# Altium PCB FIoT_BG96.PcbDoc
Units mm, origin at the board's own origin, x right, y up, seen from the top; angles counter-clockwise.
Board outline 34.2 x 39.9 mm, 4 copper layers (Top Layer, Int1 (GND), Int2 (PWR), Bottom Layer), stack 1.369 mm thick; 68 components, 41 nets, 292 pads, 116 vias.
Unrouted connection lines stored in the file: 92.
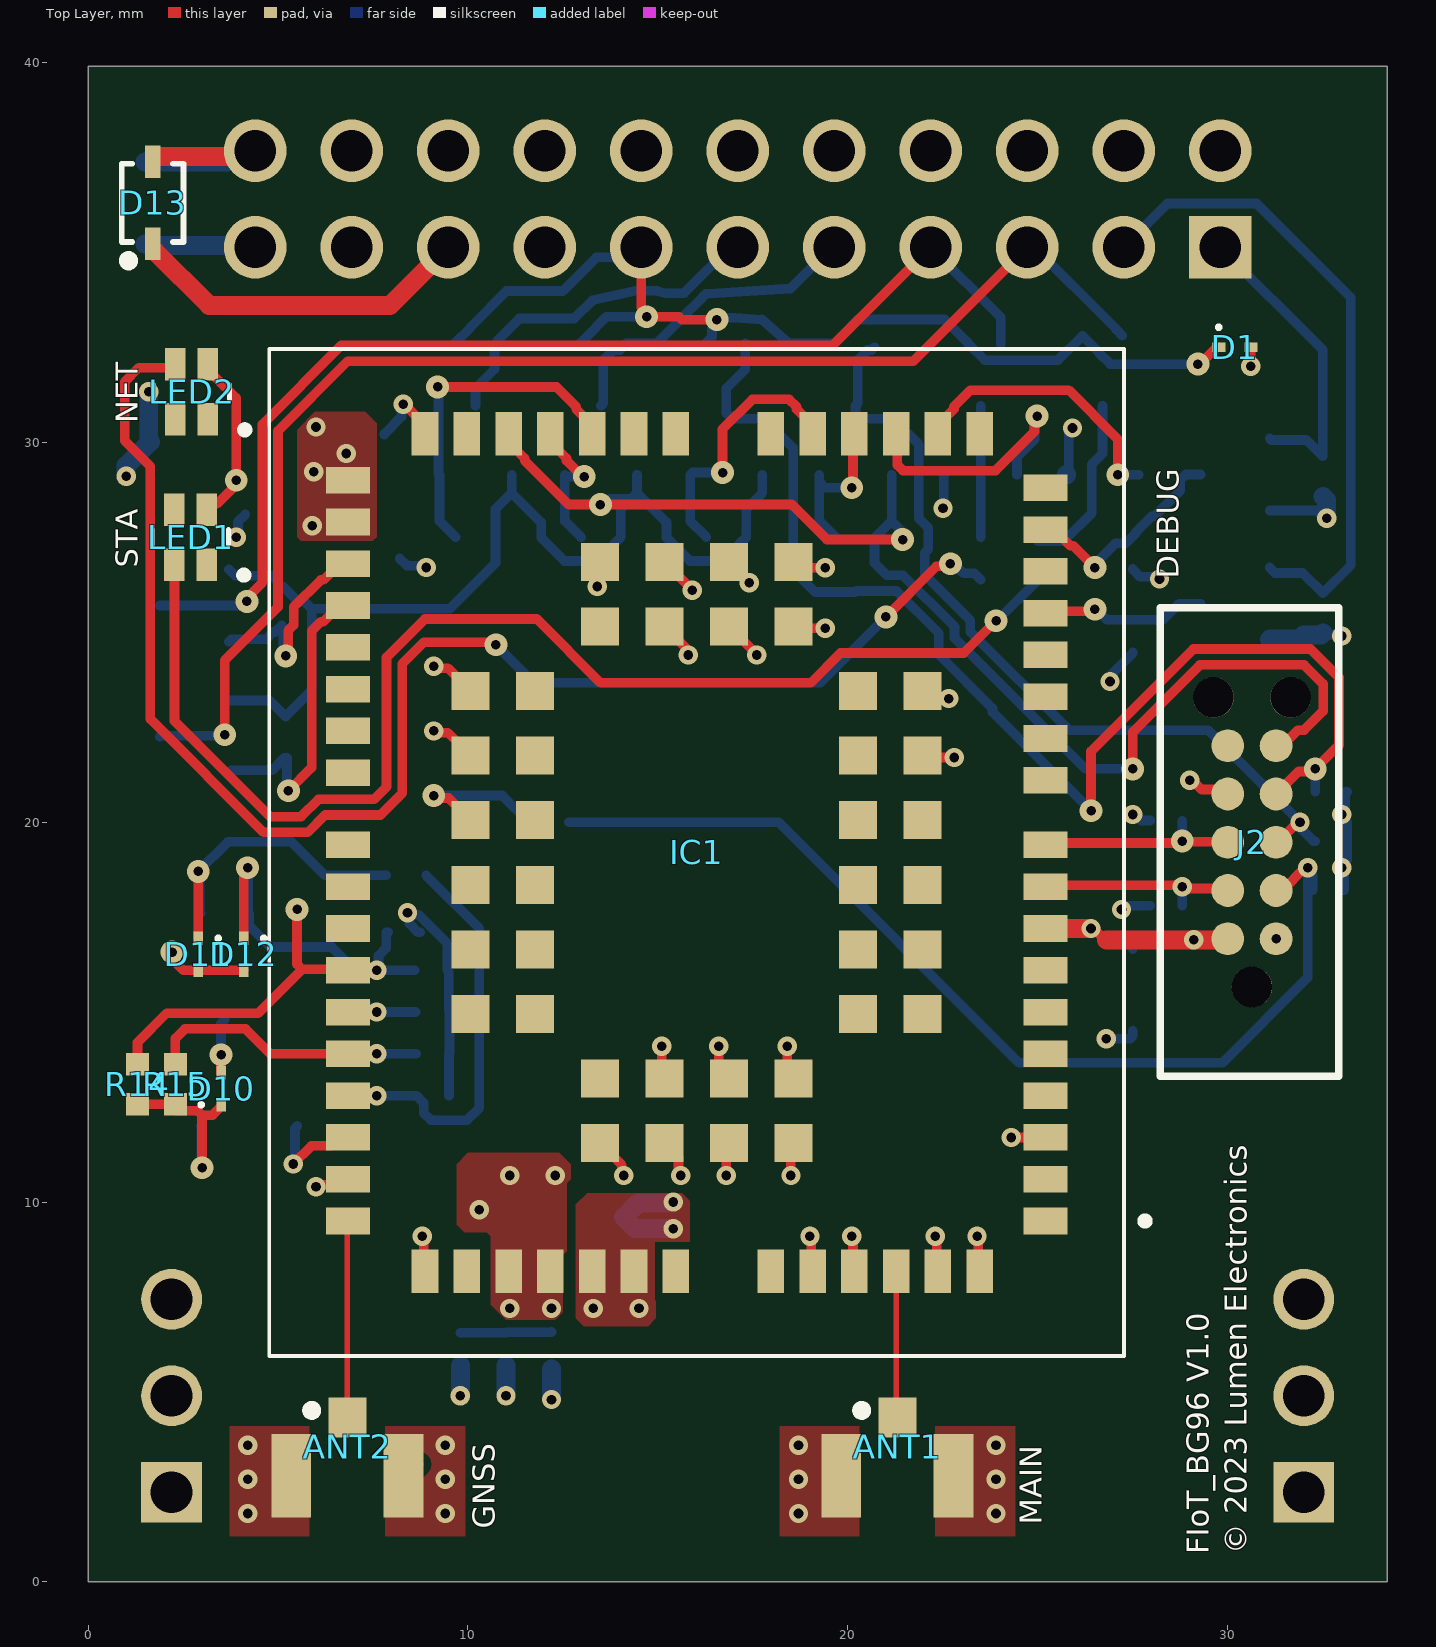
[diagram p0: Top Layer view]
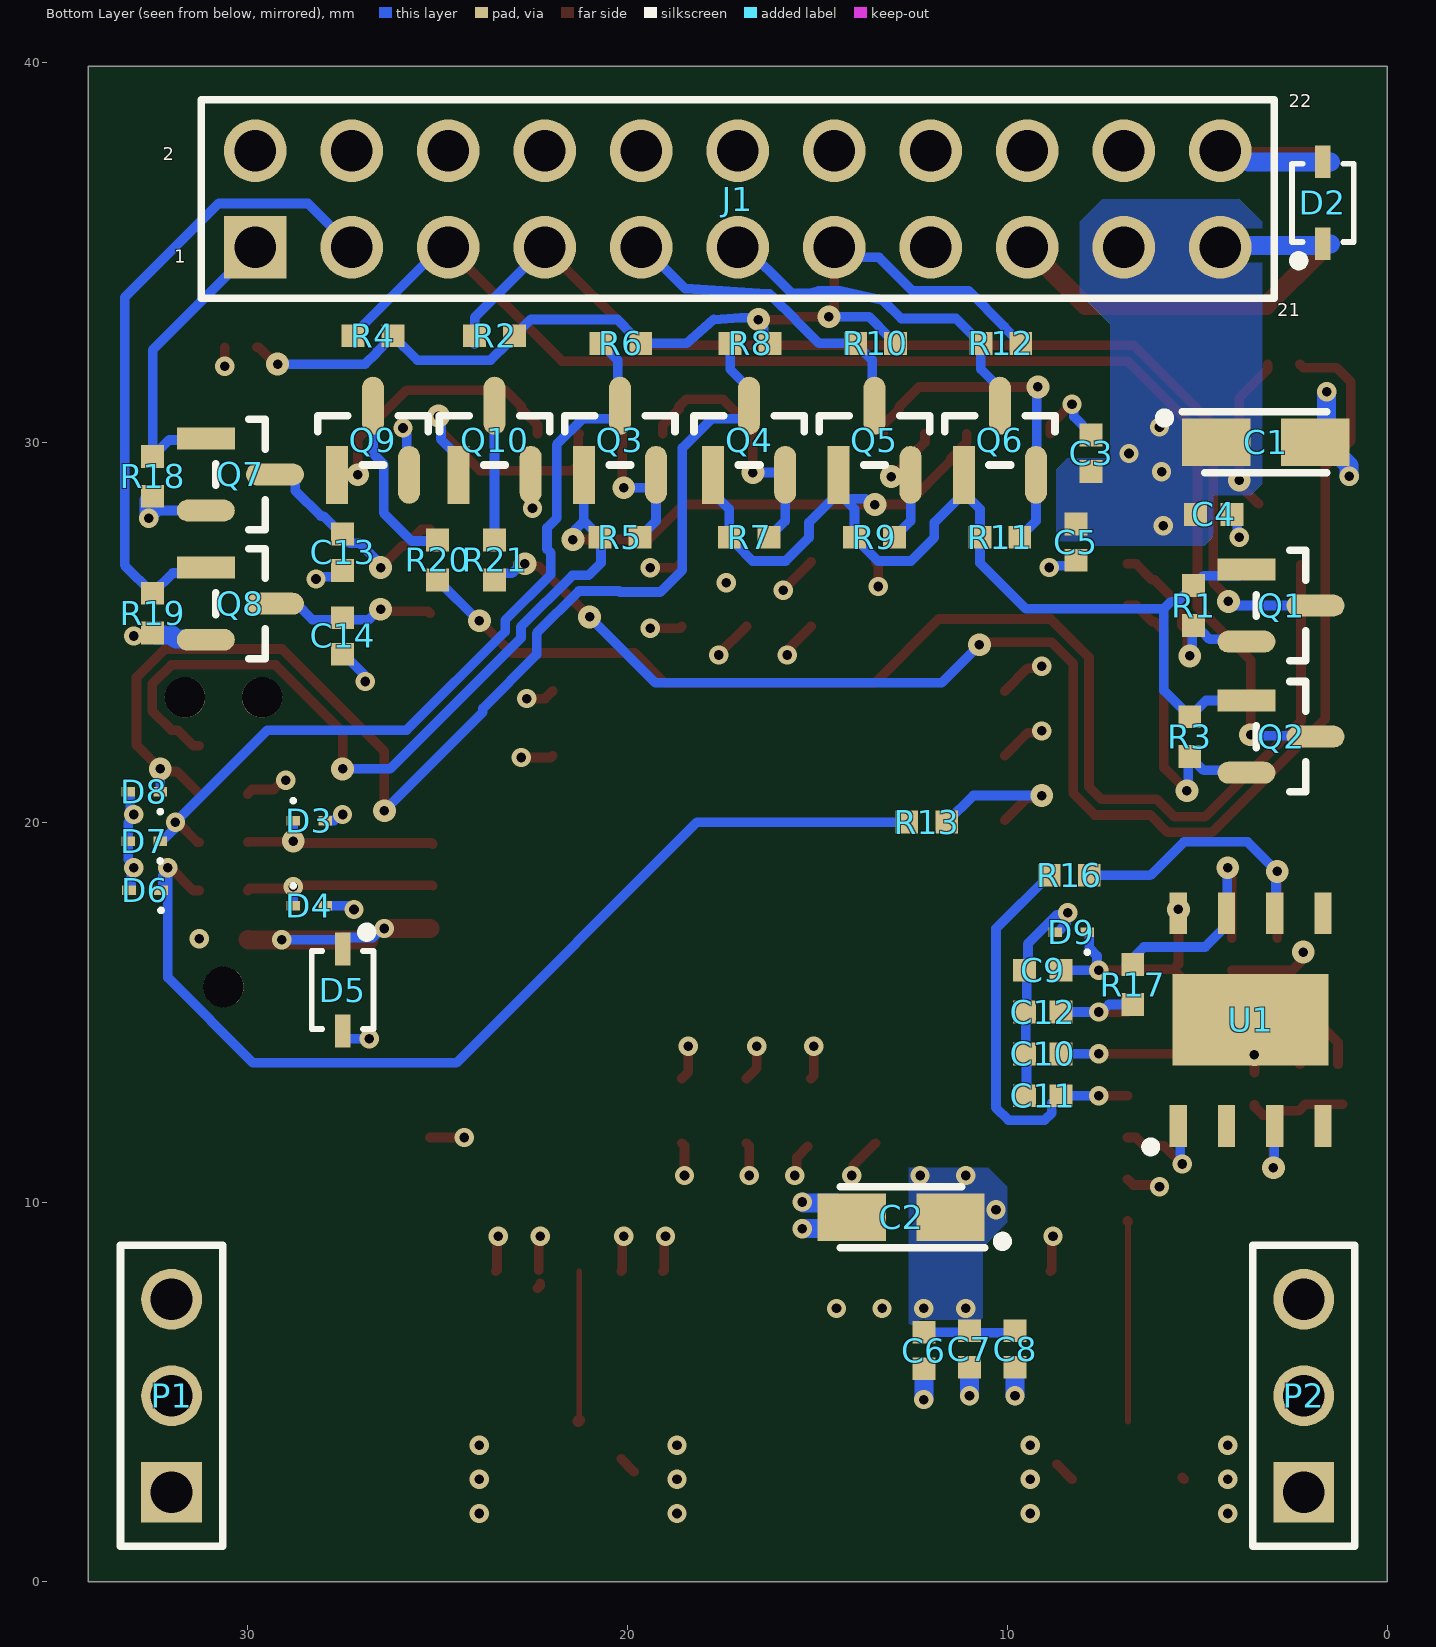
[diagram p1: Bottom Layer view, seen from below]
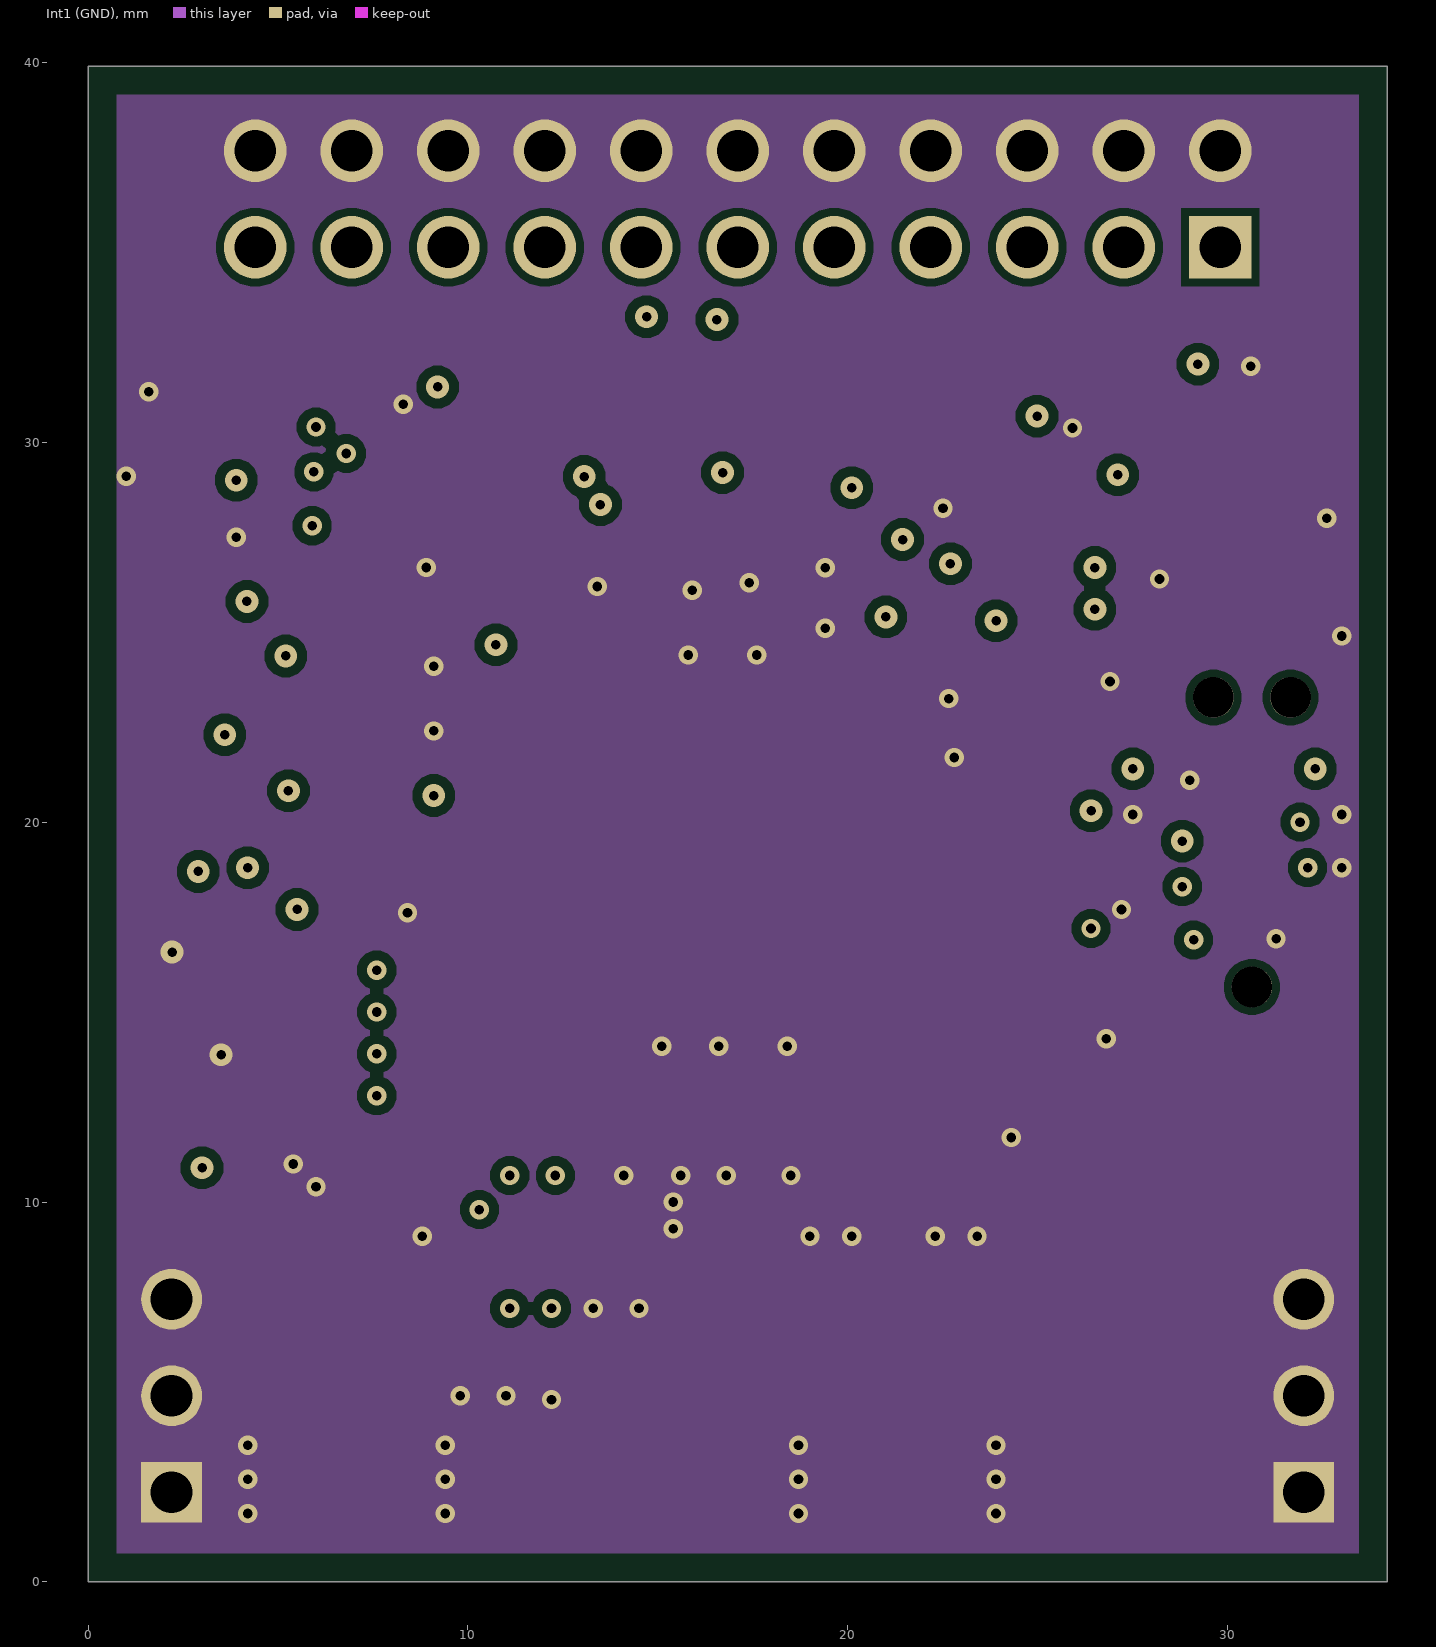
[diagram p2: Int1 (GND)]
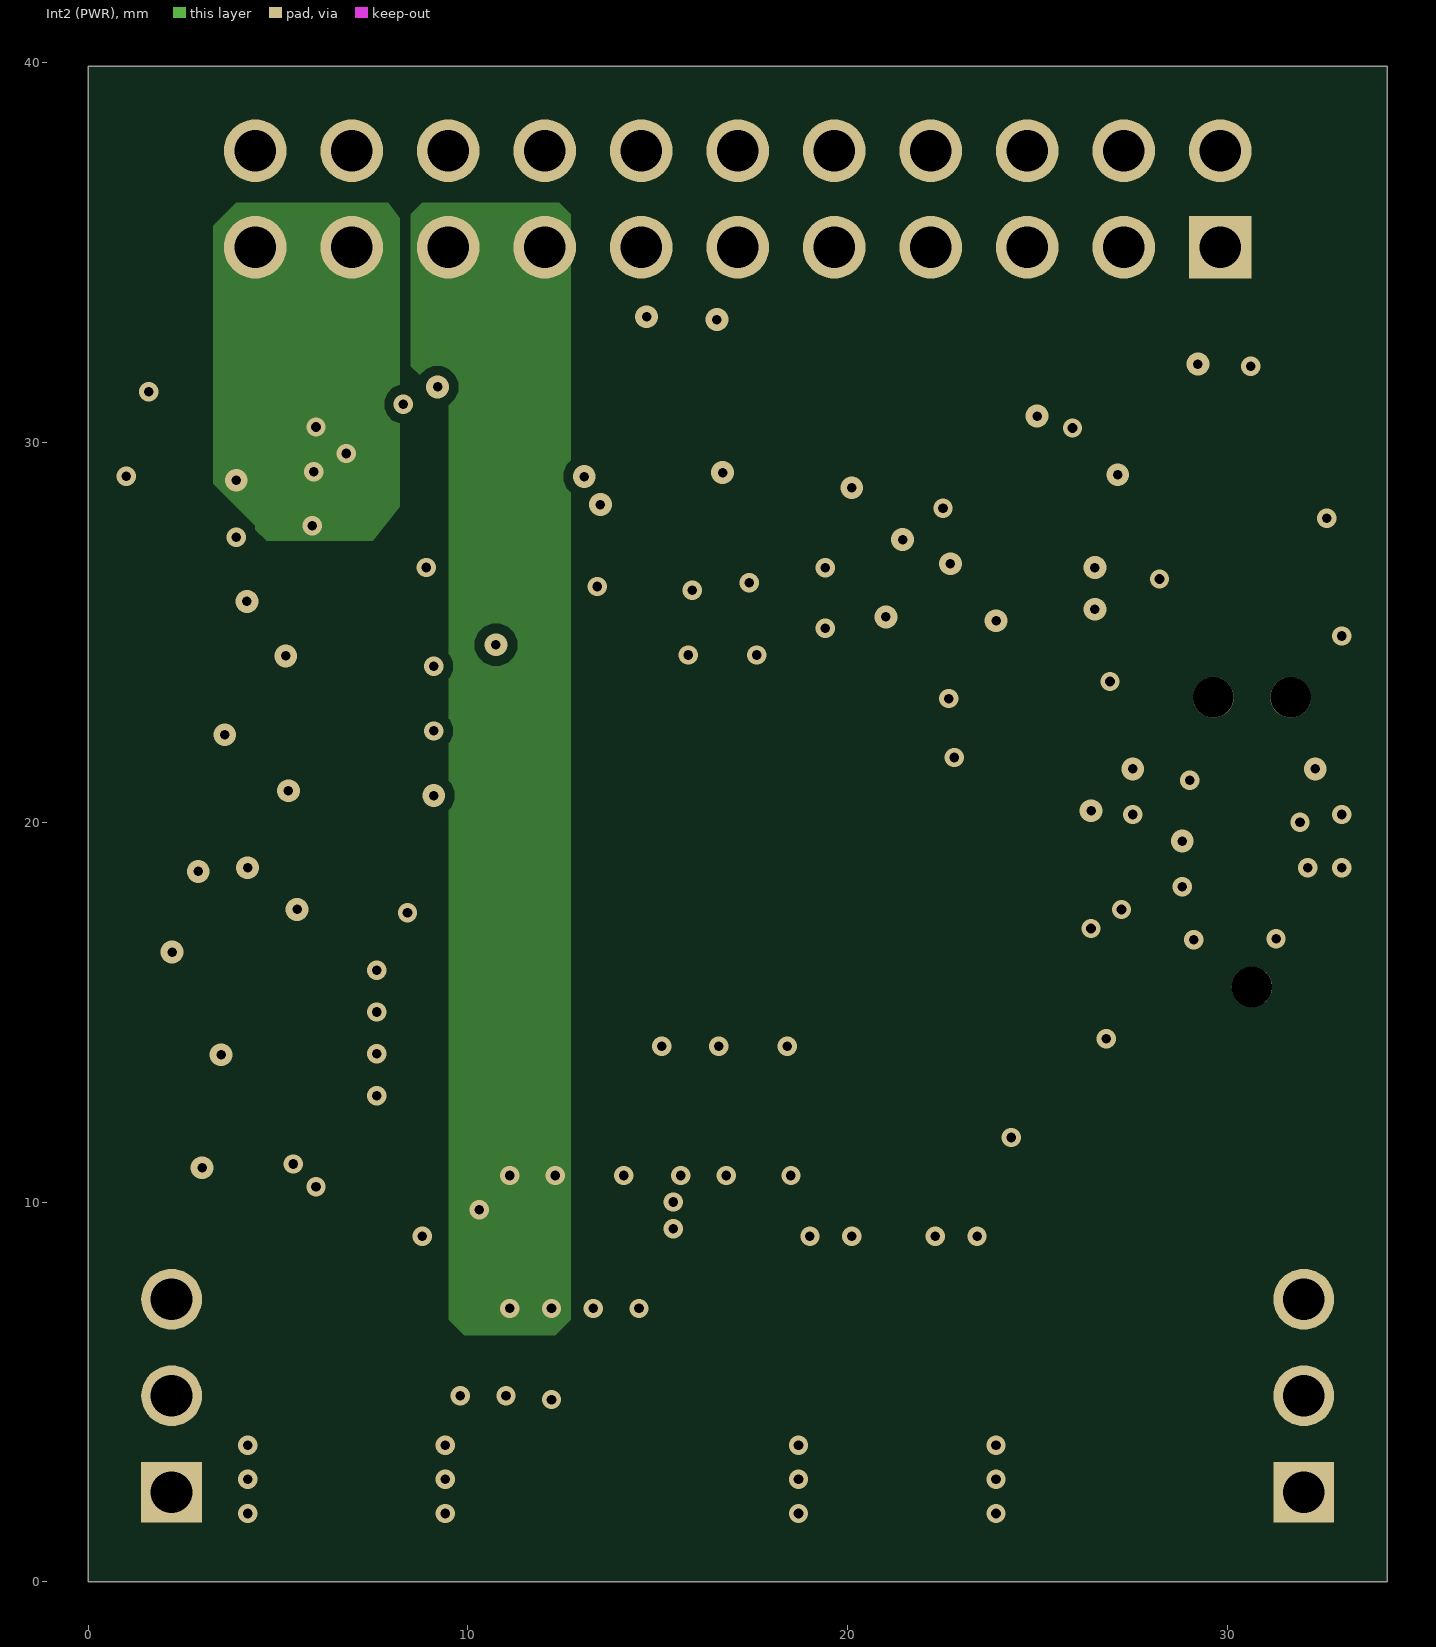
[diagram p3: Int2 (PWR)]
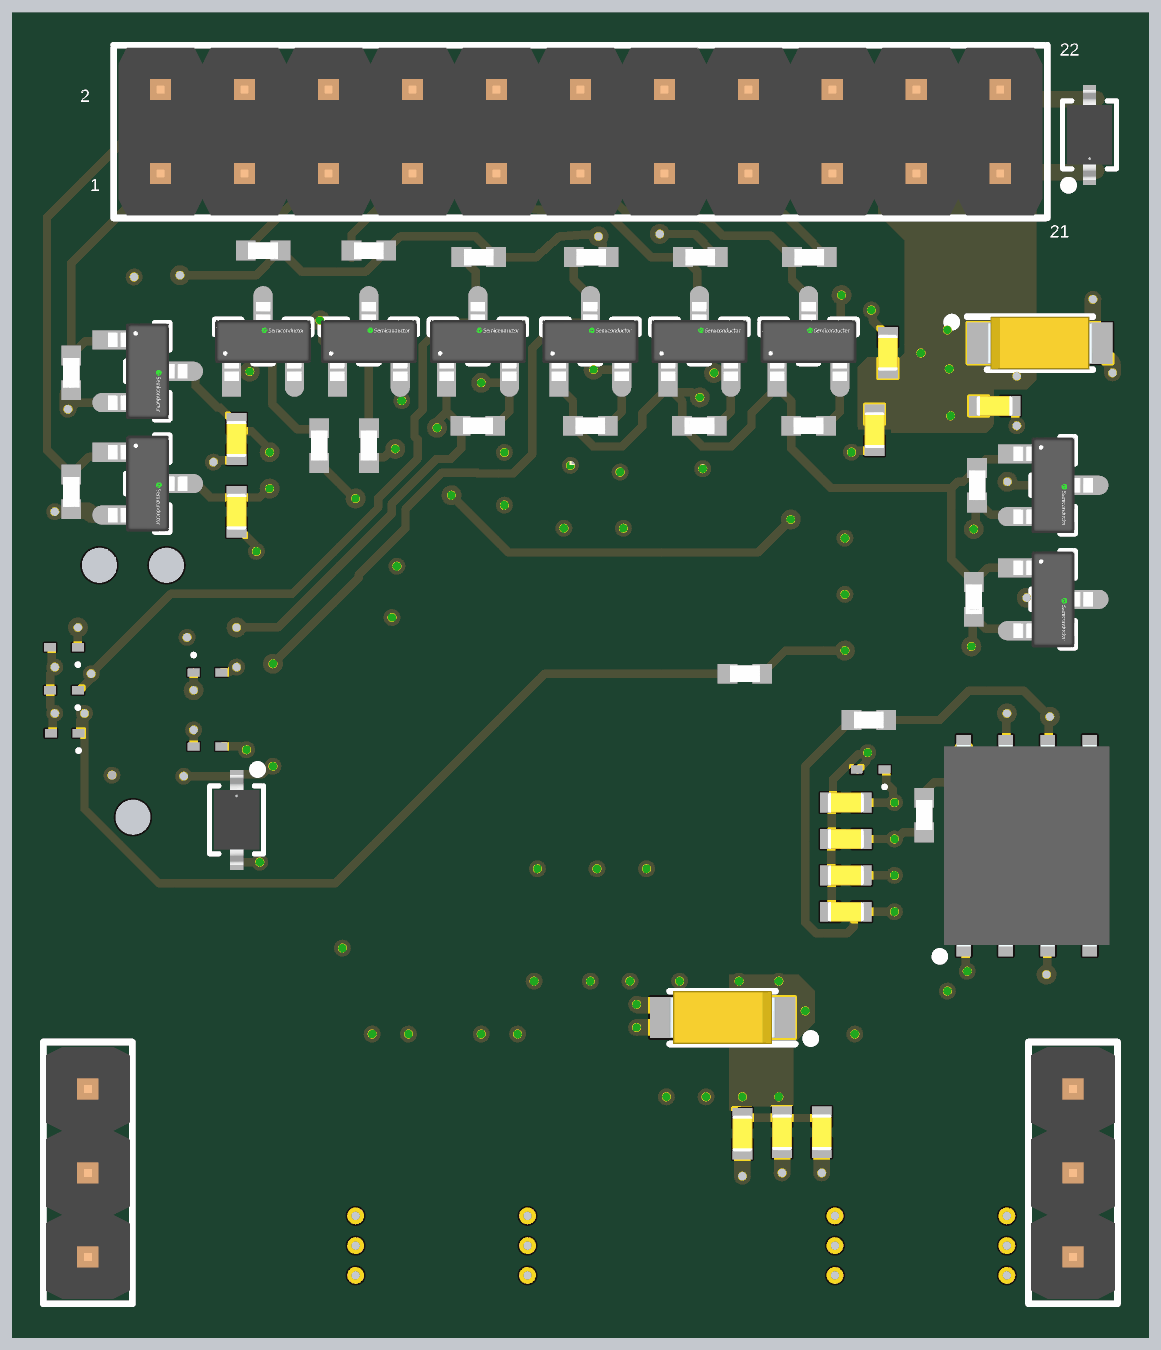
[diagram p4: 3D render of the assembled board from below, using the file's embedded part models]

## Layer stack, top to bottom
Top Solder: solder mask 0.0254, SM-001, Dk 4
Top Layer: signal copper 0.035
Dielectric 1: prepreg 0.1295, PP-017, Dk 4.3
Dielectric 2: prepreg 0.1295, PP-017, Dk 4.3
Int1 (GND): signal copper 0.035
Dielectric 3: core 0.7112, Core-039, Dk 4.8
Int2 (PWR): signal copper 0.035
Dielectric 4: prepreg 0.1295, PP-017, Dk 4.3
Dielectric 5: prepreg 0.1295, PP-017, Dk 4.3
Bottom Layer: signal copper 0.035
Bottom Solder: solder mask 0.0254, SM-001, Dk 4

## Board outline
0,0 34.2,0 34.2,39.9 0,39.9

## Design rules (kind name [scope] priority, off if disabled: settings)
BoardOutlineClearance [All] p1: gap=0.75 ignorepadtopadclearanceinfootprint=FALSE
Clearance [All] p1: gap=0.2 ignorepadtopadclearanceinfootprint=TRUE except(0.16: Arc-Arc Arc-Track Track-Track; 0.254: Arc-Via Track-Via SMDPad-Via THPad-Via Via-Via Via-Fill Via-Poly Via-Region Via-Hole)
MinimumSolderMaskSliver [All] p1: minsoldermaskwidth=0.2
PolygonConnect [All] p1: connectstyle=Direct reliefconductorwidth=0.5 reliefentries=4 polygonreliefangle="90 Angle" airgapwidth=0.1
RoutingVias [All] p1: holewidth=0.25 width=0.6 viastyle="Through Hole" minholewidth=0.2 minwidth=0.5 maxholewidth=0.3 maxwidth=0.7
SilkToSilkClearance [All] p1: silktosilkclearance=0.128
SilkToSolderMaskClearance [IsPad] p1: minsilkscreentomaskgap=0.07 clearancetoexposedcopper=TRUE
SolderMaskExpansion [All] p1: expansion=0.05 istentingtop=FALSE
Width [All] p1: maxlimit=3 minlimit=0.1 preferedwidth=0.254
27 further rules are at their usual default settings.

## Components (designator, comment, footprint, x,y, rotation, side; value= is the part's Value field where it differs from the comment)
ANT1 "U.FL-R-SMT(01)" HRS-U.FL-R-SMT(10)_V 21.3,2.8 r270 top locked
ANT2 "U.FL-R-SMT(01)" HRS-U.FL-R-SMT(10)_V 6.825,2.8 r270 top locked
C1 "T520A107M006ATE035" CAPPM3216X180N 3.2,30 r180 bottom value="100uF 6.3V Tant"
C2 "T520A107M006ATE035" CAPPM3216X180N 12.8,9.6 r0 bottom value="100uF 6.3V Tant"
C3 "GRM1555C1H6R0CA01D" CAPC1005X06N 7.8,29.71 r270 bottom value="5.6pF 50V"
C4 "GJM1555C1H330GB01D" CAPC1005X06N 4.57,28.1 r0 bottom value="33pF 50V"
C5 "CL05B104KB54PNC" CAPC1005X06N 8.2,27.37 r90 bottom value="100nF 50V"
C6 "GRM1555C1H6R0CA01D" CAPC1005X06N 12.2,6.09 r90 bottom value="5.6pF 50V"
C7 "GJM1555C1H330GB01D" CAPC1005X06N 11,6.13 r90 bottom value="33pF 50V"
C8 "CL05B104KB54PNC" CAPC1005X06N 9.8,6.13 r90 bottom value="100nF 50V"
C9 "CL05B104KB54PNC" CAPC1005X06N 9.07,16.1 r180 bottom value="100nF 50V"
C10 "GJM1555C1H330GB01D" CAPC1005X06N 9.07,13.9 r180 bottom value="33pF 50V"
C11 "GJM1555C1H330GB01D" CAPC1005X06N 9.07,12.8 r180 bottom value="33pF 50V"
C12 "GJM1555C1H330GB01D" CAPC1005X06N 9.07,15 r180 bottom value="33pF 50V"
C13 "CL05B104KB54PNC" CAPC1005X06N 27.5,27.1 r90 bottom value="100nF 50V"
C14 "CL05B104KB54PNC" CAPC1005X06N 27.5,24.9 r90 bottom value="100nF 50V"
D1 "ESD9X3.3ST5G" ONSC-SOD-923-2-514AA-01_V 30.18,32.5 r0 top value="3V3 TVS"
D2 "PZ3D4V2H" CR_SD05_SEM-L 1.7,36.3 r90 bottom
D3 "ESD9L5.0ST5G" ONSC-SOD-923-2-514AA-01_V 28.38,20.04 r180 bottom value="5V TVS"
D4 "ESD9L5.0ST5G" ONSC-SOD-923-2-514AA-01_V 28.38,17.8 r180 bottom value="5V TVS"
D5 "SD12C.TCT" CR_SD05_SEM-L 27.5,15.579 r270 bottom
D6 "ESD9X3.3ST5G" ONSC-SOD-923-2-514AA-01_V 32.7,18.2 r0 bottom value="3V3 TVS"
D7 "ESD9X3.3ST5G" ONSC-SOD-923-2-514AA-01_V 32.72,19.5 r0 bottom value="3V3 TVS"
D8 "ESD9X3.3ST5G" ONSC-SOD-923-2-514AA-01_V 32.72,20.8 r0 bottom value="3V3 TVS"
D9 "ESD9L5.0ST5G" ONSC-SOD-923-2-514AA-01_V 8.32,17.1 r0 bottom value="5V TVS"
D10 "ESD9L5.0ST5G" ONSC-SOD-923-2-514AA-01_V 3.5,12.98 r90 top value="5V TVS"
D11 "ESD9L5.0ST5G" ONSC-SOD-923-2-514AA-01_V 2.9,16.52 r270 top value="5V TVS"
D12 "ESD9L5.0ST5G" ONSC-SOD-923-2-514AA-01_V 4.1,16.52 r270 top value="5V TVS"
D13 "PZ3D4V2H" CR_SD05_SEM-L 1.7,36.3 r90 top
IC1 "BG96MA" BG96MA 16.02,19.2 r180 top locked
J1 "61302221121" 61302221121 17.1,36.4 r180 bottom locked
J2 "TC2050-IDC-430" TC2050-IDC_LUMEN 28.095,18.517 r90 top locked
LED1 "LTST-C19HE1WT" LED_LTST-C19HE1WT 2.7,27.5 r180 top locked
LED2 "LTST-C19HE1WT" LED_LTST-C19HE1WT 2.725,31.325 r180 top locked
P1 "61300311121" 61300311121 32,4.9 r90 bottom
P2 "61300311121" 61300311121 2.2,4.9 r90 bottom
Q1 "BSS138K" FP-318-08-IPC_B 2.8,25.7 r180 bottom locked
Q2 "BSS138K" FP-318-08-IPC_B 2.8,22.25 r180 bottom
Q3 "BSS138K" FP-318-08-IPC_B 20.2,30.05 r90 bottom
Q4 "BSS138K" FP-318-08-IPC_B 16.8,30.05 r90 bottom
Q5 "BSS138K" FP-318-08-IPC_B 13.5,30.05 r90 bottom
Q6 "BSS138K" FP-318-08-IPC_B 10.2,30.05 r90 bottom
Q7 "BSS138K" FP-318-08-IPC_B 30.19,29.15 r180 bottom
Q8 "BSS138K" FP-318-08-IPC_B 30.19,25.75 r180 bottom
Q9 "BSS138K" FP-318-08-IPC_B 26.7,30.05 r90 bottom
Q10 "BSS138K" FP-318-08-IPC_B 23.5,30.05 r90 bottom
R1 "0402WGF1002TCE" FP-CRCW0402-E3-MFG 5.1,25.7 r90 bottom
R2 "0402WGF1002TCE" FP-CRCW0402-E3-MFG 23.5,32.8 r180 bottom
R3 "0402WGF1002TCE" FP-CRCW0402-E3-MFG 5.2,22.25 r90 bottom
R4 "0402WGF1002TCE" FP-CRCW0402-E3-MFG 26.7,32.8 r180 bottom
R5 "0402WGF1002TCE" FP-CRCW0402-E3-MFG 20.2,27.5 r0 bottom
R6 "0402WGF1002TCE" FP-CRCW0402-E3-MFG 20.175,32.6 r180 bottom
R7 "0402WGF1002TCE" FP-CRCW0402-E3-MFG 16.8,27.5 r0 bottom
R8 "0402WGF1002TCE" FP-CRCW0402-E3-MFG 16.775,32.6 r180 bottom
R9 "0402WGF1002TCE" FP-CRCW0402-E3-MFG 13.5,27.5 r0 bottom
R10 "0402WGF1002TCE" FP-CRCW0402-E3-MFG 13.475,32.6 r180 bottom
R11 "0402WGF1002TCE" FP-CRCW0402-E3-MFG 10.2,27.5 r0 bottom
R12 "0402WGF1002TCE" FP-CRCW0402-E3-MFG 10.175,32.6 r180 bottom
R13 "0402WGF1002TCE" FP-CRCW0402-E3-MFG 12.125,20 r180 bottom
R14 "0402WGF1502TCE0402WGF1002TCE" FP-CRCW0402-E3-MFG 1.3,13.1 r90 top
R15 "0402WGF220JTCE" FP-CRCW0402-E3-MFG 2.3,13.1 r90 top
R16 "0402WGF220JTCE" FP-CRCW0402-E3-MFG 8.375,18.6 r0 bottom
R17 "0402WGF220JTCE" FP-CRCW0402-E3-MFG 6.7,15.725 r270 bottom
R18 "0402WGF1002TCE" FP-CRCW0402-E3-MFG 32.5,29.1 r90 bottom
R19 "0402WGF1002TCE" FP-CRCW0402-E3-MFG 32.5,25.5 r90 bottom
R20 "0402WGF1001TCE" FP-CRCW0402-E3-MFG 25,26.9 r270 bottom
R21 "0402WGF1001TCE" FP-CRCW0402-E3-MFG 23.5,26.9 r270 bottom
U1 "Arkessa LP MFF2" SON127P600X500X100-9N-D 3.6,14.8 r90 bottom

## Footprints (in the part's own frame and the unit in brackets; to place one, negate y for a bottom-side part, rotate by r counter-clockwise, add the part's x,y. Pads: shape width x height; smd on the part's side, far side on the other; paste and mask are expansions set on the pad)
61300311121 [mm] "Pin Header, pitch 2.54 mm, THT, Vertical, single row, 3p"
  rect 1.6x1.6 hole 1.1: 1(-2.54,0)
  round 1.6 hole 1.1: 2(0,0) 3(2.54,0)
  silkscreen extent -3.96,-1.35 3.96,1.35, body extent -3.81,-1.27 3.81,1.27, height 8.57
61302221121 [mm] "Pin Header, pitch 2.54 mm, THT, Vertical, dual row, 22p"
  rect 1.65x1.65 hole 1.1: 1(-12.7,-1.27)
  round 1.65 hole 1.1: 2(-12.7,1.27) 3(-10.16,-1.27) 4(-10.16,1.27) 5(-7.62,-1.27) 6(-7.62,1.27) 7(-5.08,-1.27) 8(-5.08,1.27) 9(-2.54,-1.27) 10(-2.54,1.27) 11(0,-1.27) 12(0,1.27) 13(2.54,-1.27) 14(2.54,1.27) 15(5.08,-1.27) 16(5.08,1.27) 17(7.62,-1.27) 18(7.62,1.27) 19(10.16,-1.27) 20(10.16,1.27) 21(12.7,-1.27) 22(12.7,1.27)
  silkscreen extent -14.12,-2.62 14.12,2.62, body extent -13.97,-2.54 13.97,2.54, height 8.59
BG96MA [mm]
  rect 1.15x0.7 smd: 1(-9.18,9.7) 2(-9.18,8.6) 3(-9.18,7.5) 4(-9.18,6.4) 5(-9.18,5.3) 6(-9.18,4.2) 7(-9.18,3.1) 8(-9.18,2) 9(-9.18,0.9) 10(-9.18,-0.2) 11(-9.18,-1.9) 12(-9.18,-3) 13(-9.18,-4.1) 14(-9.18,-5.2) 15(-9.18,-6.3) 16(-9.18,-7.4) 17(-9.18,-8.5) 18(-9.18,-9.6) 32(9.18,-9.8) 33(9.18,-8.7) 34(9.18,-7.6) 35(9.18,-6.5) 36(9.18,-5.4) 37(9.18,-4.3) 38(9.18,-3.2) 39(9.18,-2.1) 40(9.18,-0.2) 41(9.18,0.9) 42(9.18,2) 43(9.18,3.1) 44(9.18,4.2) 45(9.18,5.3) 46(9.18,6.4) 47(9.18,7.5) 48(9.18,8.6) 49(9.18,9.7)
  rect 0.7x1.15 smd: 19(-7.45,-11.025) 20(-6.35,-11.025) 21(-5.25,-11.025) 22(-4.15,-11.025) 23(-3.05,-11.025) 24(-1.95,-11.025) 25(0.55,-11.025) 26(1.65,-11.025) 27(2.75,-11.025) 28(3.85,-11.025) 29(4.95,-11.025) 30(6.05,-11.025) 31(7.15,-11.025) 50(7.15,11.025) 51(6.05,11.025) 52(4.95,11.025) 53(3.85,11.025) 54(2.75,11.025) 55(1.65,11.025) 56(0.55,11.025) 57(-1.95,11.025) 58(-3.05,11.025) 59(-4.15,11.025) 60(-5.25,11.025) 61(-6.35,11.025) 62(-7.45,11.025)
  rect 1x1 smd: 63(-5.95,4.25) 64(-5.95,2.55) 65(-5.95,0.85) 66(-5.95,-0.85) 67(-5.95,-2.55) 68(-5.95,-4.25) 69(-2.55,-7.65) 70(-0.85,-7.65) 71(0.85,-7.65) 72(2.55,-7.65) 73(5.95,-4.25) 74(5.95,-2.55) 75(5.95,-0.85) 76(5.95,0.85) 77(5.95,2.55) 78(5.95,4.25) 79(2.55,7.65) 80(0.85,7.65) 81(-0.85,7.65) 82(-2.55,7.65) 83(-4.25,4.25) 84(-4.25,2.55) 85(-4.25,0.85) 86(-4.25,-0.85) 87(-4.25,-2.55) 88(-4.25,-4.25) 89(-2.55,-5.95) 90(-0.85,-5.95) 91(0.85,-5.95) 92(2.55,-5.95) 93(4.25,-4.25) 94(4.25,-2.55) 95(4.25,-0.85) 96(4.25,0.85) 97(4.25,2.55) 98(4.25,4.25) 99(2.55,5.95) 100(0.85,5.95) 101(-0.85,5.95) 102(-2.55,5.95)
  silkscreen extent -11.9,-13.25 11.25,13.25, body extent -11.3,-13.21 11.2,13.29, height 2.51
CAPC1005X06N [mm] "Chip Capacitor, 2-Leads, Body 1.00x0.50mm, IPC Medium Density"
  rect 0.6x0.6 smd: 1(-0.48,0) 2(0.48,0)
  body extent -0.55,-0.3 0.55,0.3, height 0.6
CAPPM3216X180N [mm]
  rect 1.8x1.25 smd: 1(-1.3,0) 2(1.3,0)
  silkscreen extent -2.79,-0.8 1.6,0.8, body extent -1.6,-0.8 1.6,0.8, height 1.8
CR_SD05_SEM-L [mil]
  rect 34x16 smd paste+0 mask+0: 1(-42.5,0) 2(42.5,0)
  silkscreen extent -65,-32 40,32, body extent -54,-27 54,27, height 43
FP-318-08-IPC_B [mm]
  rect 1.524x0.578 smd paste+0 mask+0: 1(-0.91,0.95)
  rrect100% 1.524x0.578 smd paste+0 mask+0: 2(-0.91,-0.95) 3(0.91,0)
  silkscreen extent -0.65,-1.45 0.65,1.45, body extent -1.2,-1.45 1.2,1.45, height 1.11
FP-CRCW0402-E3-MFG [mm]
  rect 0.6x0.6 smd paste+0 mask+0: 1(-0.525,0) 2(0.525,0)
  body extent -0.5,-0.25 0.5,0.25, height 0.4
HRS-U.FL-R-SMT(10)_V [mm]
  rect 1.05x1 smd: 1(-1.525,0)
  rect 2.2x1.05 smd: 2(0,-1.475) 3(0,1.475)
  silkscreen extent -1.84,-1.06 -1.59,-0.81, body extent -1.3,-1.3 1.3,1.3, height 1.25
LED_LTST-C19HE1WT [mm]
  rect 0.54x0.85 smd: 1(-0.425,0.725) 2(0.425,0.725) 3(0.425,-0.725) 4(-0.425,-0.725)
  silkscreen extent -1.5,-0.2 1,1.1, body extent -0.8,-0.8 0.8,0.8, height 0.36
ONSC-SOD-923-2-514AA-01_V [mm]
  rect 0.36x0.25 smd: 1(-0.42,0) 2(0.42,0)
  silkscreen extent -0.47,0.48 -0.37,0.57, body extent -0.4,-0.3 0.4,0.3, height 0.43
SON127P600X500X100-9N-D [mm]
  rect 1.1x0.45 smd: 1(-2.8,1.905) 2(-2.8,0.635) 3(-2.8,-0.635) 4(-2.8,-1.905) 5(2.8,-1.905) 6(2.8,-0.635) 7(2.8,0.635) 8(2.8,1.905)
  rect 2.4x4.1 smd: 9(0,0)
  silkscreen extent -3.47,2.51 -3.23,2.76, body extent -3.05,-2.5 3.05,2.5, height 1
TC2050-IDC_LUMEN [mil]
  round 34 smd: 1(-62.5,-125) 2(-12.5,-125) 3(37.5,-125) 4(87.5,-125) 5(137.5,-125) 6(137.5,-75) 7(87.5,-75) 8(37.5,-75) 9(-12.5,-75) 10(-62.5,-75)
  round 42 hole 42 unplated: 11(-112.5,-100) 12(187.5,-60.04) 13(187.5,-139.96)
  silkscreen extent -205,-190 280,-5

## Part data
ANT1 ANT2: "CONN RECPT ULTRA-MINI COAX SMD", Centre Contact Resistance=25mohm, Contact Resistance=10mohm, Flammability Rating=UL94V-0, Frequency Max=6GHz, Insulation Resistance=500Mohm, JLC Footprint=ANT-SMD, JLCPCB Part #=C434812, Manufacturer="Hirose Electric", Operating Temperature Max=90degC, Operating Temperature Min=-40degC, Package Description="3-Pin Surface Mount Device, Body 2.6 x 2.6 mm", Package Reference=U.FL-R-SMT(10), Supplier Part Number 1=3908021, Voltage Rating V AC=60V, Approval Category=UL94V-0, Body Plating=Silver, Body Style=StraightJack, Coaxial Termination=Solder, Connector Mounting=PCB, Connector Mounting Orientation=PCBoard, Connector Type=UFLCoaxial, Contact Material=PhosphorBronze, Contact Plating=Gold, Datasheet URL=http://www.farnell.com/datasheets/91524.pdf, Datasheet Version=Feb-04, External Length / Height=2.5mm, Female Contact Material=PhosphorBronze, Female Contact Plating=Gold, Impedance=50ohm, Jacket Material=LCP, Male Contact Material=Brass, Male Contact Plating=Gold, Manufacturer Part Number=U.FL-R-SMT(01), Manufacturer URL=https://www.hirose.com, Material=PhosphorBronze, MFG Name=Hirose, MFG Part Number=U.FL-R-SMT(01), Mounting Type=PCBoard, Operating Frequency Max=6GHz, Outer Contact Resistance=10mohm, Secondary Insulation Material=PBT, Supplier 1=Farnell, Supplier 2=Digi-Key, Supplier 3=Mouser, Supplier Part Number 2=H9161-ND, Supplier Part Number 3=798-U.FL-R-SMT01, SVHC=NoSVHC(18-Jun-2012), Termination Method=Solder, VSWR=1.3
C1 C2: "Tantalum Capacitors - Polymer 6.3 VDC 100uF 1206 20% ESR=35mOhms", JLC Footprint="Not available with JLC", Manufacturer_Name=Kemet, Mouser Part Number=80-T520A107M006AT, Supplier Part Number 1=2855176, Arrow Part Number=T520A107M006ATE035, Arrow Price/Stock=https://www.arrow.com/en/products/t520a107m006ate035/kemet-corporation, Datasheet Link=https://search.kemet.com/component-edge/download/specsheet/T520A107M006ATE035.pdf, Height=1.8mm, JLCPCB Part #="Not available with JLC", Manufacturer_Part_Number=T520A107M006ATE035, MFG Name=Kemet, MFG Part Number=T520A107M006ATE035, Mouser Price/Stock=https://www.mouser.co.uk/ProductDetail/KEMET/T520A107M006ATE035?qs=QvRObDHRS18agZVs%252BDin8A%3D%3D, Supplier 1=Farnell, Supplier 2=Mouser, Supplier Part Number 2=80-T520A107M006AT
C3 C6: library part CC0402BRNPO9BN5R6, "5.6pF 50V NP0 ±0.1pF 0402 MLCC", JLC Footprint=CAP-SMD, JLCPCB Part #=C162118, Manufacturer=TDK, Manufacturer Part Number=C1005C0G1H060C, Supplier Part Number 1=490-8222-1-ND, MFG Name=Murata, MFG Part Number=GRM1555C1H6R0CA01D, Part Number=GRM1555C1H6R0CA01D, Supplier 1=Digi-Key, Supplier 2=Mouser, Supplier Part Number 2=81-GRM1555C1H6R0CA1D
C4 C7 C10 C11 C12: "33pF 50V C0G ±2% 0402 MLCC", JLC Footprint=CAP-SMD, JLCPCB Part #=C162118, Manufacturer=TDK, Manufacturer Part Number=C1005C0G1H060C, MFG Part Number=GRM1555C1H6R0CA01D, Supplier Part Number 1=3784396, MFG Name=Murata, Part Number=GRM1555C1H6R0CA01D, Supplier 1=Farnell, Supplier 2=Digi-Key, Supplier 3=Mouser, Supplier Part Number 2=490-GJM1555C1H330GB01DCT-ND, Supplier Part Number 3=81-GJM1555C1H330GB1D
C5 C8 C9 C13 C14: "100nF 50V X7R ±10% 0402 MLCC", JLC Footprint=CAP-SMD, JLCPCB Part #=C162118, Manufacturer=TDK, Manufacturer Part Number=C1005C0G1H060C, MFG Part Number=GRM1555C1H6R0CA01D, Supplier Part Number 1=1276-CL05B104KB54PNCCT-ND, MFG Name=Murata, Part Number=GRM1555C1H6R0CA01D, Supplier 1=Digi-Key, Supplier 2=Mouser, Supplier Part Number 2=187-CL05B104KB54PNC
D1 D6 D7 D8: "Transient Voltage Suppressor, Micro-Packaged Diode for ESD Protection, 2-Pin SOD-923, Pb-Free, Tape and Reel", JLC Footprint=SOD-923, JLCPCB Part #=C130456, Manufacturer="On Semiconductor", Supplier Part Number 1=2627963, ComponentLink1Description="Manufacturer URL", ComponentLink1URL=http://www.onsemi.com/, ComponentLink2Description=Datasheet, ComponentLink2URL=http://www.onsemi.cn/pub_link/Collateral/ESD9X3.3ST5G-D.PDF, ComponentLink3Description="Package Specification", ComponentLink3URL=http://www.onsemi.com/pub_link/Collateral/514AA.PDF, DatasheetVersion="Rev. 7", Direction=Unidirectional, IR Max (uA)=2.5, Manufacturer Part Number=ESD9X3.3ST5G, MFG Name="ON Semiconductor", MFG Part Number=ESD9X3.3ST5G, Mounting Technology="Surface Mount", Number of Lines=1, PackageDescription="2-Pin SOD, Body 0.8 x 0.6 mm", PackageReference=SOD-923-2-514AA-01, PackageVersion="Rev. E, 03/2011", Packing="Tape and Reel", PartNumber=ESD9X3.3ST5G, RoHS=Pb-Free, Supplier 1=Farnell, Supplier 2=Mouser, Supplier 3=LCSC, Supplier Part Number 2=863-ESD9X3.3ST5G, Supplier Part Number 3=C130456, V(BR) Min (V)=5, VRWM Max (V)=3.3
D2 D13: "5uA@4.2V 55Ω Single 500mW 5.1V SOD-323 Zener Diodes ROHS", Manufacturer_Part_Number=SD12C.TCT, Mfr_Name=Semtech, Copyright="Copyright (C) 2022 Ultra Librarian. All rights reserved.", RefDes=RefDes, Type=DEV
D3 D4 D9 D10 D11 D12: "Transient Voltage Suppressor, ESD Protection Diode with Ultra-Low Capacitance, 2-Pin SOD-923, Pb-Free, Tape and Reel", JLC Footprint=SOD-923, JLCPCB Part #=C82326, Manufacturer="ON Semiconductor", Manufacturer_Name="On Semiconductor", Supplier Part Number 1=ESD9L5.0ST5GOSCT-ND, C Max (pF)=0.9, ComponentLink1Description="Manufacturer URL", ComponentLink1URL=http://www.onsemi.com/, ComponentLink2Description=Datasheet, ComponentLink2URL=http://www.onsemi.cn/pub_link/Collateral/ESD9L-D.PDF, ComponentLink3Description="Package Specification", ComponentLink3URL=http://www.onsemi.com/pub_link/Collateral/514AB.PDF, DatasheetVersion="Rev. 5", Direction=Unidirectional, IR Max (uA)=1, Manufacturer Part Number=ESD9L5.0ST5G, Manufacturer_Part_Number=ESD9L5.0ST5G, MFG Name=onsemi, MFG Part Number=ESD9L5.0ST5G, Mounting Technology="Surface Mount", Number of Lines=1, PackageDescription="2-Pin SOD, Body 0.8 x 0.6 mm", PackageReference=SOD-923-2-514AB-01, PackageVersion="Rev. C, 03/2011", Packing="Tape and Reel", PartNumber=ESD9L5.0ST5G, RoHS=Pb-Free, Supplier 1=Digi-Key, Supplier 2=Mouser, Supplier 3=LCSC, Supplier Part Number 2=863-ESD9L5.0ST5G, Supplier Part Number 3=C82326, V(BR) Min (V)=5.4, VRWM Max (V)=5
D5: "TVS DIODE 12VWM 24VC SOD323", Mfr_Name=Semtech, Supplier Part Number 1=SD12C.TCTCT-ND, Copyright="Copyright (C) 2022 Ultra Librarian. All rights reserved.", Manufacturer_Part_Number=SD12C.TCT, RefDes=RefDes, Supplier 1=Digi-Key, Supplier 2=Mouser, Supplier 3=LCSC, Supplier Part Number 2=947-SD12C.TCT, Supplier Part Number 3=C85198, Type=DEV
IC1: "Cellular EDGE, GPRS, GSM, HSPA, LTE, UMTS Transceiver Module 850MHz, 900MHz, 1.8GHz, 1.9GHz Antenna Not Included Surface Mount", JLC Footprint="Not available with JLC", Manufacturer_Name=Quectel, Supplier Part Number 1=2958-BG96MA-128-SGNTR-ND, Datasheet Link=http://www.quectel.com/product/bg96.htm, Height=2mm, JLCPCB Part #="Not available with JLC", Manufacturer_Part_Number=BG96MA, MFG Name=Quectel, MFG Part Number=BG96MA, Supplier 1=Digi-Key, Supplier 2=Mouser, Supplier Part Number 2=277-BG96MA-128-SGN
J1: library part CMP-1502-01108-1, "THT Vertical Pin Header WR-PHD, Pitch 2.54 mm, Dual Row, 22 pins", Contact Resistance=20mOhm, Manufacturer="Wurth Elektronik", Operating Temperature=-40to105degC, Rated Current=3A, Withstanding Voltage=500VAC, Working Voltage=250VAC, Datasheet URL=https://katalog.we-online.de/em/datasheet/6130xx21121.pdf, Gender=Male, Manufacturer URL=http://www.we-online.de, Mounting Technology=THT, Orientation=Vertical, Package Reference=61302221121, Packaging=Bag, Part Number=61302221121, Pin Number=22, Pitch=2.54mm, Publisher=WurthElektronik, Row Number=Dual
J2: "Connector", Manufacturer_Name="Tag Connect", Datasheet Link=https://datasheet.datasheetarchive.com/originals/distributors/Datasheets_SAMA/8a7b9a42a753a5cbaca4256ee093e59c.pdf, Manufacturer_Part_Number=TC2050-IDC-430
LED1 LED2: "Red, Green, Blue _RGB_ 624nm Red, 525nm Green, 470nm Blue LED Indication - Discrete 2.1V Red, 3.35V Green, 3.35V Blue 0606 _1616 Metric_", Package="0606 Lite-On", Supplier Part Number 1=160-2162-1-ND, Availability=Unavailable, MF="Lite-On Inc.", MP=LTST-C19HE1WT, Price=None, SnapEDA_Link=https://www.snapeda.com/parts/LTST-C19HE1WT/Lite-On%20Inc./view-part/423425/?ref=snap, Supplier 1=Digi-Key, Supplier 2=Mouser, Supplier Part Number 2=859-LTST-C19HE1WT
P1 P2: library part CMP-1502-01062-1, "THT Vertical Pin Header WR-PHD, Pitch 2.54 mm, Single Row, 3 pins", Contact Resistance=20mOhm, Manufacturer="Wurth Elektronik", Operating Temperature=-40to105degC, Rated Current=3A, Withstanding Voltage=500VAC, Working Voltage=250VAC, Datasheet URL=https://katalog.we-online.de/em/datasheet/6130xx11121.pdf, Gender=Male, Manufacturer URL=http://www.we-online.de, Mounting Technology=THT, Orientation=Vertical, Package Reference=61300311121, Packaging=Bag, Part Number=61300311121, Pin Number=3, Pitch=2.54mm, Publisher=WurthElektronik, Row Number=Single
Q1 Q2 Q3 Q4 Q5 Q6 Q7 Q8 Q9 Q10: "MOSFET N-CH 50V 220MA SOT-23", Case/Package=SOT-23, Continuous Drain Current (ID)=220mA, Drain to Source Breakdown Voltage=50V, Drain to Source Resistance=3.5R, Gate to Source Voltage (Vgs)=20V, Input Capacitance=27pF, JLC Footprint=SOT-23-3, JLCPCB Part #=C52895, Manufacturer="ON Semiconductor / Fairchild", Manufacturer Part Number=BSS138, Max Operating Temperature=150°C, Max Power Dissipation=360mW, Min Operating Temperature=-55°C, On-State Resistance=6R, Package Quantity=1, Supplier Part Number 1=BSS138K-13DICT-ND, Threshold Voltage=1.3V, Contact Plating=Tin, Current Rating=220mA, Drain to Source Voltage (Vdss)=50V, Dual Supply Voltage=50V, Element Configuration=Single, Fall Time=9ns, Height=0.93mm, Lead Free="Lead Free", Length=2.92mm, MFG Name="ON Semiconductor / Fairchild", MFG Part Number=BSS138, Mount="Surface Mount", Nominal Vgs=1.3V, Number of Elements=1, Number of Pins=3, Packaging="Tape and Reel", Power Dissipation=360mW, Radiation Hardening=No, Rds On Max=3.5R, REACH SVHC="No SVHC", Rise Time=9ns, Supplier 1=Digi-Key, Supplier 2=Farnell, Supplier 3=Mouser, Supplier Part Number 2=3943470, Supplier Part Number 3=621-BSS138K-13, Termination=SMD/SMT, Turn-Off Delay Time=20ns, Turn-On Delay Time=2.5ns, Voltage Rating (DC)=50V, Weight=0.03g, Width=1.3mm
R1 R2 R3 R4 R5 R6 R7 R8 R9 R10 R11 R12 R13 R18 R19: "Res Thick Film 0402 10K Ohm 1% 0.063W", Case Code (Imperial)=0402, Case Code (Metric)=1005, JLC Footprint=R0402, JLCPCB Part #="Not available with JLC", Manufacturer="Vishay Dale", Manufacturer Part Number=CRCW04021K00FKED, Max Operating Temperature=155°C, Max Power Dissipation=63mW, Min Operating Temperature=-55°C, Package Quantity=10, Resistance=10k, Supplier Part Number 1=303-0402WGF1002TCE, Temperature Coefficient=100ppm/°C, Tolerance=1%, Voltage Rating=50V, Case/Package=0402, Composition="Thick Film", Contact Plating=Tin, Depth=0.5mm, Features="Automotive AEC-Q200", Height=0.35mm, Lead Free="Lead Free", Length=1mm, MFG Name="Vishay Dale", MFG Part Number=CRCW04021K00FKED, Military Standard=Not, Mount="Surface Mount", Number of Pins=2, Number of Terminations=2, Packaging="Tape and Reel", Power Rating=63mW, Radiation Hardening=No, Supplier 1=Mouser, Supplier 2=LCSC, Supplier Part Number 2=C25744, Termination=SMD/SMT, Voltage Rating (DC)=50V, Weight=2.3E-05oz, Width=0.5mm
R14: library part 0402WGF1502TCE, "Res Thick Film 0402 15K Ohm 1% 0.063W", Case Code (Imperial)=0402, Case Code (Metric)=1005, JLC Footprint=R0402, JLCPCB Part #="Not available with JLC", Manufacturer="Vishay Dale", Manufacturer Part Number=CRCW04021K00FKED, Max Operating Temperature=155°C, Max Power Dissipation=63mW, Min Operating Temperature=-55°C, Package Quantity=10, Resistance=15k, Supplier Part Number 1=1127145, Temperature Coefficient=100ppm/°C, Tolerance=1%, Voltage Rating=50V, Case/Package=0402, Composition="Thick Film", Contact Plating=Tin, Depth=0.5mm, Features="Automotive AEC-Q200", Height=0.35mm, Lead Free="Lead Free", Length=1mm, MFG Name="Vishay Dale", MFG Part Number=CRCW04021K00FKED, Military Standard=Not, Mount="Surface Mount", Number of Pins=2, Number of Terminations=2, Packaging="Tape and Reel", Power Rating=63mW, Radiation Hardening=No, Supplier 1=Farnell, Supplier 2=Mouser, Supplier 3=LCSC, Supplier Part Number 2=303-0402WGF1502TCE, Supplier Part Number 3=C25756, Termination=SMD/SMT, Voltage Rating (DC)=50V, Weight=2.3E-05oz, Width=0.5mm
R15 R16 R17: "Res Thick Film 0402 22R Ohm 1% 0.063W", Case Code (Imperial)=0402, Case Code (Metric)=1005, JLC Footprint=R0402, JLCPCB Part #="Not available with JLC", Manufacturer="Vishay Dale", Manufacturer Part Number=CRCW04021K00FKED, Max Operating Temperature=155°C, Max Power Dissipation=63mW, Min Operating Temperature=-55°C, Package Quantity=10, Resistance=22R, Supplier Part Number 1=303-0402WGF220JTCE, Temperature Coefficient=100ppm/°C, Tolerance=1%, Voltage Rating=50V, Case/Package=0402, Composition="Thick Film", Contact Plating=Tin, Depth=0.5mm, Features="Automotive AEC-Q200", Height=0.35mm, Lead Free="Lead Free", Length=1mm, MFG Name="Vishay Dale", MFG Part Number=CRCW04021K00FKED, Military Standard=Not, Mount="Surface Mount", Number of Pins=2, Number of Terminations=2, Packaging="Tape and Reel", Power Rating=63mW, Radiation Hardening=No, Supplier 1=Mouser, Termination=SMD/SMT, Voltage Rating (DC)=50V, Weight=2.3E-05oz, Width=0.5mm
R20 R21: "Res Thick Film 0402 1K Ohm 1% 0.063W", Case Code (Imperial)=0402, Case Code (Metric)=1005, JLC Footprint=R0402, JLCPCB Part #="Not available with JLC", Manufacturer="Vishay Dale", Manufacturer Part Number=CRCW04021K00FKED, Max Operating Temperature=155°C, Max Power Dissipation=63mW, Min Operating Temperature=-55°C, Package Quantity=10, Resistance=1K, Supplier Part Number 1=303-0402WGF1001TCE, Temperature Coefficient=100ppm/°C, Tolerance=1%, Voltage Rating=50V, Case/Package=0402, Composition="Thick Film", Contact Plating=Tin, Depth=0.5mm, Features="Automotive AEC-Q200", Height=0.35mm, Lead Free="Lead Free", Length=1mm, MFG Name="Vishay Dale", MFG Part Number=CRCW04021K00FKED, Military Standard=Not, Mount="Surface Mount", Number of Pins=2, Number of Terminations=2, Packaging="Tape and Reel", Power Rating=63mW, Radiation Hardening=No, Supplier 1=Mouser, Termination=SMD/SMT, Voltage Rating (DC)=50V, Weight=2.3E-05oz, Width=0.5mm
U1: "ESIM", JLC Footprint="Not available with JLC", JLCPCB Part #="Not available with JLC", MFG Name=Arkessa, MFG Part Number="Arkessa LP MFF2"

## Via types
v1: diameter 0.508, hole 0.254, Top Layer to Bottom Layer, tented both sides, 71 vias
v2: diameter 0.6, hole 0.25, Top Layer to Bottom Layer, tented both sides, 33 vias
v3: diameter 0.508, hole 0.254, Top Layer to Bottom Layer, 12 vias

## Nets (pads, with @x,y where several pads share a name; then routed paths per layer and width w, separated by ;. In a path a pad name is that pad's centre, name@x,y a point inside that pad or via, vN(x,y) a via of type N, cw(c..) or ccw(c..) an arc to the next point about the centre after c; other vN are vias at no path point)
5V_USB: D5.1 IC1.8 J2.10 | length 7.9
  Top Layer w0.254: v1(26.4,17.2) 26.469,17.2 26.769,16.9 26.8,16.9 ; J2.10@29.985,16.915 J2.10
  Top Layer w0.5: IC1.8 v1(26.4,17.2) ; 26.8,16.9 v1(29.1,16.9) 29.102,16.902 29.972,16.902 J2.10@29.985,16.915
  Bottom Layer w0.254: v1(26.4,17.2) 26.469,17.2 26.705,16.964 27.512,16.964 27.576,16.9 v1(29.1,16.9) ; D5.1 D5.1@27.5,16.824
+3V3: D1.1 J1.13 R2.2 R4.2 R6.2 R8.2 R10.2 R12.2 | length 27.5
  Top Layer w0.254: J1.13@14.56,35.2 14.56,33.534 14.7,33.394 v2(14.7,33.3) 15.553,33.3 15.634,33.219 16.544,33.219 v2(16.554,33.229) ; v2(29.213,32.054) 29.263,32.054 29.709,32.5 D1.1
  Bottom Layer w0.254: R12.2 10.073,33.023 10.073,33.035 11.016,33.978 12.497,33.978 13.382,34.863 14.223,34.863 J1.13@14.56,35.2 ; R10.2 13.373,33.023 13.373,33.035 13.638,33.3 v2(14.7,33.3) ; R8.2 16.423,32.773 16.423,33.004 v2@16.547,33.128 ; v2(16.554,33.229) 16.602,33.277 17.014,33.277 17.735,33.227 17.741,33.222 18.439,32.6 R6.2 20.073,33.023 20.073,33.035 20.265,33.227 22.548,33.227 23.148,32.627 23.148,32.615 23.602,32.16 25.535,32.16 R4.2 26.598,32.377 26.598,32.365 26.909,32.054 v2(29.213,32.054)
+3V8_BB: C1.1 C3.2 C4.2 C5.2 D2.1 IC1.32 IC1.33 J1.19 J1.21 LED1.4 LED2.4 | length 7.1
  Top Layer w0.254: LED2.4 3.15,31.917 3.9,31.167 3.9,28.906 3.798,28.804 3.798,28.784 LED1.4@3.389,28.375
  Bottom Layer w0.5: D2.1@1.5,35.221 D2.1 1.745,35.175 J1.21@4.334,35.175
  other v1: 5.9,27.8 5.943,29.219 6.8,29.7 6,30.4
  other v2: 3.9,29
+3V8_RF: C2.1 C6.2 C7.2 C8.2 D13.1 IC1.52 IC1.53 J1.15 J1.17 | length 11.4
  Top Layer w0.5: D13.1@1.747,35.039 3.185,33.6 7.95,33.6 J1.17
  Bottom Layer w0.254: C8.2@9.8,6.56 11,6.56 11.01,6.57 12.19,6.57 C6.2@12.2,6.58
  other v1: 11.1,7.2 12.2,7.2 10.3,9.8 11.1,10.7 12.3,10.7
ANT: ANT1.1 IC1.60 | length 4
  Top Layer w0.15: ANT1.1@21.27,4.255 IC1.60
  Top Layer w0.3: ANT1.1@21.27,4.255 ANT1.1@21.3,4.225
ANT_GNSS: ANT2.1 IC1.49 | length 5.3
  Top Layer w0.15: ANT2.1@6.825,4.225 IC1.49@6.825,9.485
  Top Layer w0.254: IC1.49@6.825,9.485 IC1.49
BG96_DEBUG_UART_RX: IC1.22 Q3.2 R5.1 | length 4.2
  Top Layer w0.254: v2(20.1,28.8) 20.135,28.835 20.135,30.19 IC1.22
  Bottom Layer w0.254: Q3.2 Q3.2@19.25,28.95 ; R5.1 19.25,27.925 Q3.2@19.25,28.95 ; v2(20.1,28.8) 19.4,28.8 Q3.2@19.25,28.95
BG96_DEBUG_UART_TX: IC1.23 Q4.2 R7.1 | length 7.1
  Top Layer w0.254: v2(16.7,29.2) 16.7,30.342 17.485,31.127 18.455,31.127 18.647,30.935 18.647,30.873 19.07,30.45 IC1.23
  Bottom Layer w0.254: R7.1 15.85,27.925 Q4.2 15.91,29.2 v2(16.7,29.2)
BG96_GNSS_UART_RX: IC1.28 Q5.2 R9.1 | length 3.9
  Top Layer w0.254: IC1.28 12.17,30 12.593,29.577 12.593,29.515 13.012,29.096 v2(13.058,29.096)
  Bottom Layer w0.254: R9.1 12.55,27.925 Q5.2 12.594,29.096 v2(13.058,29.096)
BG96_GNSS_UART_TX: IC1.27 Q6.2 R11.1 | length 8.9
  Top Layer w0.254: v2(9.2,31.453) 12.33,31.453 12.847,30.935 12.847,30.873 13.27,30.45 IC1.27
  Bottom Layer w0.254: v2(9.2,31.453) 9.225,31.428 9.225,29.165 Q6.2 9.25,27.925 R11.1
BG96_NET: IC1.21 Q10.1 | length 7.1
  Top Layer w0.254: IC1.21 21.3,30.195 21.3,29.4 21.449,29.251 23.884,29.251 24.911,30.279 24.911,30.621 v2(24.978,30.687)
  Bottom Layer w0.254: Q10.1 24.45,29.613 24.911,30.074 24.911,30.621 v2(24.978,30.687)
BG96_PWRKEY: C14.2 IC1.15 Q8.3 | length 4.4
  Top Layer w0.254: IC1.15 25.25,25.55 26.45,25.55 v2(26.5,25.6)
  Bottom Layer w0.254: v2(26.5,25.6) 26.539,25.6 26.809,25.33 28.299,25.33 28.719,25.75 Q8.3
BG96_RESET: C13.2 IC1.17 Q7.3 | length 5.7
  Top Layer w0.254: IC1.17 25.425,27.7 25.848,27.277 25.923,27.277 v2(26.5,26.7)
  Bottom Layer w0.254: v2(26.5,26.7) 26.5,26.792 27.045,27.337 27.307,27.337 27.584,27.614 27.584,27.634 28.001,28.051 28.074,28.051 28.745,28.721 28.745,29 28.894,29.15 Q7.3
BG96_STATUS: IC1.20 Q9.1 | length 7.4
  Top Layer w0.254: IC1.20 22.37,30.45 22.793,30.873 22.793,30.935 23.226,31.368 25.813,31.368 27.101,30.081 v2(27.101,29.14)
  Bottom Layer w0.254: v2(27.101,29.14) Q9.1
BG96_UART1_RX: IC1.34 Q1.2 R1.1 | length 5.5
  Top Layer w0.254: v2(5.203,24.373) 5.269,24.439 5.269,25.04 5.414,25.185 5.414,25.661 6.13,26.377 6.192,26.377 6.615,26.8 IC1.34
  Bottom Layer w0.254: Q1.2 3.772,24.812 4.679,24.812 4.869,25.002 4.927,25.002 R1.1 ; R1.1@5.1,25 5.137,24.963 5.137,24.439 v2(5.203,24.373)
BG96_UART1_TX: IC1.35 Q2.2 R3.1 | length 8.3
  Top Layer w0.254: v2(5.275,20.825) 5.884,21.434 5.884,25.031 6.13,25.277 6.192,25.277 6.615,25.7 IC1.35
  Bottom Layer w0.254: Q2.2 3.772,21.362 4.837,21.362 5.162,21.687 5.238,21.687 5.238,20.863 v2(5.275,20.825)
EXT_DEBUG_UART_RX: D8.1 J2.4 Q4.3 R8.1 | length 32.3
  Top Layer w0.254: v2(26.4,20.3) 26.4,21.862 29.092,24.554 32.178,24.554 32.924,23.808 32.924,22.024 32.234,21.334 31.864,21.334 J2.4
  Bottom Layer w0.254: R8.1 17.3,31.919 16.8,31.419 16.8,30.764 16.95,30.614 17.789,30.614 18.558,29.846 18.558,26.636 19.137,26.057 20.198,26.057 20.222,26.081 21.282,26.081 22.391,24.972 22.391,24.409 23.808,22.992 23.808,22.892 v2(26.4,20.3) ; D8.1 v2(32.3,21.4)
EXT_DEBUG_UART_TX: D7.1 J2.3 Q3.3 R6.1 | length 21.9
  Top Layer w0.254: J2.3 31.32,19.47 31.85,20 v1(31.9,20)
  Bottom Layer w0.254: R6.1@20.7,32.5 20.627,32.427 20.527,32.427 20.262,32.162 20.262,31.022 Q3.3 20.2,30.764 20.35,30.614 21.189,30.614 21.867,29.936 21.867,27.996 22.119,27.744 22.119,27.182 22.019,27.082 22.019,26.515 23.219,25.315 23.219,25.018 25.817,22.42 29.48,22.42 31.949,19.951 31.949,19.8 32.249,19.5 D7.1
EXT_GNSS_UART_RX: J1.11 Q6.3 R12.1 | length 9.1
  Bottom Layer w0.254: Q6.3 10.2,31.419 10.7,31.919 R12.1@10.7,32.5 ; R12.1@10.773,32.673 11.353,33.253 12.796,33.253 13.276,33.734 14.418,33.981 14.477,33.981 ccw(c14.56,35.13) 14.643,33.981 14.982,33.981 15.192,33.92 15.69,33.92 16.969,35.2 J1.11@17.1,35.2
EXT_GNSS_UART_TX: J1.9 Q5.3 R10.1 | length 8.5
  Bottom Layer w0.254: Q5.3 13.562,31.022 13.562,32.162 13.827,32.427 14,32.427 14.173,32.6 14.963,32.6 15.572,33.209 15.572,33.217 16.18,33.826 16.197,33.84 16.265,33.9 16.336,33.91 18.485,34.045 J1.9@19.64,35.2
GND: ANT1.2 ANT1.3 ANT2.2 ANT2.3 C1.2 C2.2 C3.1 C4.1 C5.1 C6.1 C7.1 C8.1 C9.1 C10.1 C11.1 C12.1 C13.1 C14.1 D1.2 D2.2 D3.2 D4.2 D5.2 D6.2 D7.2 D8.2 D9.2 D10.2 D11.2 D12.2 D13.2 IC1.3 IC1.31 IC1.47 IC1.48 IC1.50 IC1.54 IC1.55 IC1.58 IC1.59 IC1.61 IC1.62 IC1.67 IC1.68 IC1.69 IC1.70 IC1.71 IC1.72 IC1.73 IC1.74 IC1.79 IC1.80 IC1.81 IC1.82 IC1.89 IC1.90 IC1.91 IC1.100 IC1.101 IC1.102 J1.2 J1.4 J1.6 J1.8 J1.10 J1.12 J1.14 J1.16 J1.18 J1.20 J1.22 J2.1 J2.7 P1.1 P1.2 P1.3 P2.1 P2.2 P2.3 Q7.2 Q8.2 Q9.2 Q10.2 R18.1 R19.1 U1.1 U1.9 | length 69
  Top Layer w0.254: v2(2.213,16.58) 2.279,16.513 2.279,16.33 2.509,16.1 D11.2 ; D11.2@2.902,16.1 D12.2 ; D10.2 v2(3.5,13.877) ; ANT2.2@5.35,2.7 ANT2.2@5.4,2.75 ; v1(5.4,11) 5.877,11.477 6.392,11.477 6.615,11.7 IC1.47 ; v1(6,10.4) 6.049,10.449 6.689,10.449 IC1.48 ; ANT2.3@8.3,2.7 ANT2.3@8.698,3.098 ; v1(8.3,31) 8.32,31 8.87,30.45 IC1.31 ; v1(8.8,9.1) 8.835,9.065 8.835,8.21 IC1.50 ; v1(9.1,22.4) 9.149,22.351 9.469,22.351 IC1.74 ; v1(9.1,24.1) 9.149,24.051 9.469,24.051 IC1.73 ; v1(13.4,26.2) 13.4,26.78 IC1.72 ; IC1.79 14.051,10.969 14.051,10.749 v1(14.1,10.7) ; v1(15.1,14.1) 15.1,13.32 IC1.100 ; IC1.91 15.751,24.569 15.751,24.449 v1(15.8,24.4) ; IC1.71 15.9,26.12 v1(15.9,26.1) ; IC1.80@15.26,11.46 15.543,11.177 15.543,10.826 15.6,10.769 v1(15.6,10.7) ; v1(16.6,14.1) 16.6,13.52 IC1.101 ; v1(16.8,10.7) 16.8,11.48 IC1.81 ; IC1.90 17.6,24.42 v1(17.6,24.4) ; v1(18.4,14.1) 18.4,13.42 IC1.102 ; v1(18.5,10.7) 18.5,11.48 IC1.82 ; IC1.89 18.62,25.1 v1(19.4,25.1) ; IC1.69 18.728,26.692 v1(19.4,26.692) ; v1(19,9.1) 19.035,9.065 19.035,8.21 IC1.58 ; ANT1.2@19.825,2.9 ANT1.2@20.17,3.245 ; v1(20.1,9.1) 20.135,9.065 20.135,8.21 IC1.59 ; IC1.67 22.02,21.7 v1(22.8,21.7) ; IC1.68 22.169,23.251 v1(22.651,23.251) ; IC1.61@22.3,7.857 22.3,7.797 IC1.61@22.37,7.727 ; v1(22.3,9.1) 22.335,9.065 IC1.61@22.335,8.21 ; v1(23.4,9.1) 23.435,9.065 23.435,8.21 IC1.62 ; v1(24.3,11.7) IC1.3 ; v1(29,21.1) 29.069,21.1 29.312,20.857 29.883,20.857 J2.7 ; v1(30.6,32) D1.2
  Top Layer w0.5: D13.2@1.747,37.525 4.185,37.525 J1.22@4.4,37.74
  Bottom Layer w0.254: v2(3.5,13.877) 3.5,14.7 U1.9 ; J1.22@3.662,37.38 3.685,37.403 4.063,37.403 J1.22@4.4,37.74 ; v1(3.9,27.5) 3.949,27.549 3.949,27.909 C4.1@4.14,28.1 ; v1(5.4,11) 5.449,11.049 5.449,11.944 U1.1 ; C3.1@7.8,30.2 7.8,30.22 8.251,30.671 8.251,30.951 v1(8.3,31) ; C5.1@8.2,26.94 8.391,26.749 8.851,26.749 v1(8.9,26.7) ; v1@8.4,17.6 8.458,17.542 8.458,17.331 8.689,17.1 D9.2 ; v1(8.41,17.611) 8.458,17.563 8.698,17.563 9.46,16.801 9.46,16.1 9.495,16.065 9.495,15.035 9.53,15 9.515,14.985 9.515,13.915 9.5,13.9 C11.1@9.5,12.8 ; v1(22.502,28.259) 22.526,28.282 22.526,29.116 Q10.2 ; Q9.2@25.75,29.15 25.812,29.212 25.812,30.205 25.911,30.304 v1(25.911,30.373) ; v1(26.8,14.3) 27.424,14.3 27.5,14.376 D5.2 ; v1(26.9,23.7) 26.949,23.749 26.949,23.899 27.5,24.45 C14.1@27.5,24.47 ; v1(27.2,17.7) 27.269,17.7 27.369,17.8 D4.2 ; v1(27.5,20.2) 27.569,20.2 27.727,20.042 27.958,20.042 D3.2 ; C13.1@27.5,26.67 27.5,26.65 27.693,26.457 28.074,26.457 28.131,26.4 v1(28.2,26.4) ; Q7.2 32.331,28.2 32.531,28 v1(32.6,28) ; R19.1@32.563,24.937 32.963,24.937 v1(33,24.9) ; D6.2@33.067,18.202 33.067,18.664 33,18.731 33,18.869 33.14,19.009 v1@33.14,19.991 ; D7.2 v1@33.14,19.991 ; D8.2 33.089,20.8 33.087,20.798 33.087,20.356 33,20.269 33,20.131 v1@33.14,19.991
  Bottom Layer w0.5: v1(1.004,29.1) 1.006,29.102 1.006,29.381 1.625,30 1.648,30 1.598,30.05 v1(1.598,31.325) ; D2.2@1.5,37.38 J1.22@3.662,37.38 ; v1(9.8,4.9) C8.1@9.8,5.7 ; v1(11,4.9) C7.1@11,5.7 ; v1(12.2,4.8) C6.1@12.2,5.6 ; v1(15.4,9.3) 15.398,9.302 14.398,9.302 C2.2 14.475,9.975 15.373,9.975 15.398,10 v1(15.4,10) ; Q9.2 Q9.2@25.75,29.15 ; Q8.2 31.115,24.815 31.886,24.815 31.996,24.925 32.45,24.925 R19.1 ; R18.1 32.6,28.475 v1(32.6,28)
  other v1: 13.3,7.2 14.5,7.2 31.27,16.93 33,18.8 33,20.2 17.4,26.3
  other v3: 4.2,1.8 9.4,1.8 18.7,1.8 23.9,1.8 4.2,2.7 9.4,2.7 18.7,2.7 23.9,2.7 4.2,3.6 9.4,3.6 18.7,3.6 23.9,3.6
GSM_USB_BOOT: IC1.75 R13.2 | length 4
  Top Layer w0.254: v2(9.1,20.7) 9.166,20.634 9.486,20.634 IC1.75
  Bottom Layer w0.254: v2(9.1,20.7) 10.9,20.7 R13.2
GSM_USB_D+: D4.1 IC1.9 J2.9 | length 5.4
  Top Layer w0.254: IC1.9@25.13,18.325 25.14,18.335 28.727,18.335 28.811,18.251 29.949,18.251 J2.9
  Bottom Layer w0.254: D4.1 v1(28.8,18.3)
GSM_USB_D-: D3.1 IC1.10 J2.8 | length 5.5
  Top Layer w0.254: IC1.10@25.13,19.425 25.155,19.45 28.75,19.45 v2(28.8,19.5) 28.815,19.485 29.985,19.485 J2.8
  Bottom Layer w0.254: v2(28.8,19.5) D3.1
MCU_BG96_PWRKEY: J1.3 Q8.1 R19.2 | length 17.2
  Bottom Layer w0.254: J1.3 28.412,36.282 30.76,36.282 33.235,33.807 33.235,26.76 R19.2 31.968,26.557 31.243,26.557 Q8.1
MCU_BG96_RESET: J1.1 Q7.1 R18.2 | length 8.2
  Bottom Layer w0.254: J1.1 32.5,32.43 R18.2 32.066,30.059 31.141,30.059 Q7.1
MCU_UART1_RX: J1.5 Q2.3 R4.1 | length 35.5
  Top Layer w0.254: v2(3.6,22.3) 3.6,24.261 5,25.661 5,30.298 6.836,32.134 21.724,32.134 J1.5
  Bottom Layer w0.254: Q2.3 1.915,22.275 3.575,22.275 v2(3.6,22.3) ; J1.5@24.72,35.2 24.837,35.2 27.052,32.985 27.052,32.973 R4.1
MCU_UART1_TX: J1.7 Q1.3 R2.1 | length 30
  Top Layer w0.254: v2(4.183,25.807) 4.183,25.901 4.586,26.303 4.586,30.47 6.664,32.548 19.598,32.548 J1.7
  Bottom Layer w0.254: Q1.3 3.983,25.7 4.09,25.807 v2(4.183,25.807) ; J1.7 24.025,33.285 R2.1@24.025,32.574
NetD6_1: D6.1 J2.2 R13.1 | length 27.6
  Top Layer w0.254: J2.2 31.435,18.2 31.435,18.204 32.031,18.8 v1(32.1,18.8)
  Bottom Layer w0.254: R13.1 18.172,20 24.507,13.665 29.857,13.665 32.1,15.908 v1(32.1,18.8) 32.1,18.731 32.227,18.604 D6.1@32.227,18.202
NetD10_1: D10.1 R14.1 R15.1 U1.3 | length 5.1
  Top Layer w0.254: R14.1@1.175,12.575 2.156,12.575 2.329,12.402 2.886,12.402 3,12.287 ; v2(3,10.9) 3,12.287 ; D10.1 3.5,12.509 3.278,12.287 3,12.287
  Bottom Layer w0.254: U1.3 2.983,11.982 2.983,10.917 v2(3,10.9)
NetD11_1: D11.1 R16.1 U1.6 | length 8.5
  Top Layer w0.254: D11.1 v2(2.9,18.7)
  Bottom Layer w0.254: U1.6 2.933,17.632 2.933,18.667 v2(2.9,18.7) 3.681,19.481 5.357,19.481 6.238,18.6 R16.1
NetD12_1: D12.1 R17.1 U1.7 | length 6.5
  Top Layer w0.254: D12.1 4.1,18.606 4.2,18.706 v2(4.2,18.8)
  Bottom Layer w0.254: v2(4.2,18.8) 4.217,18.782 4.217,17.617 U1.7 4.235,17.275 4.797,16.713 6.41,16.713 R17.1@6.874,16.25
NetLED1_2: LED1.2 R20.2 | length 33.9
  Top Layer w0.254: LED1.2 2.275,22.662 4.793,20.144 5.611,20.144 6.068,20.601 7.528,20.601 7.854,20.927 7.854,24.338 8.863,25.347 11.811,25.347 13.493,23.665 19.023,23.665 19.807,24.449 23.049,24.449 v2(23.9,25.3)
  Bottom Layer w0.254: v2(23.9,25.3) 23.925,25.3 R20.2
NetLED2_3: LED2.3 R21.2 | length 39.8
  Top Layer w0.254: LED2.3 2.21,31.96 1.335,31.96 0.963,31.588 0.963,30.039 1.639,29.363 1.639,22.712 4.621,19.73 5.783,19.73 6.239,20.187 7.699,20.187 8.268,20.755 8.268,24.166 8.837,24.735 10.574,24.735 10.643,24.666 v2(10.737,24.666) ; v2(21,25.4) 22.334,26.734 22.634,26.734 v2(22.7,26.8)
  Bottom Layer w0.254: v2(10.737,24.666) 11.738,23.665 19.265,23.665 v2(21,25.4) ; v2(22.7,26.8) 22.794,26.8 23.046,26.548 23.327,26.548 R21.2
NetQ9_3: Q9.3 R20.1 | length 4.7
  Bottom Layer w0.254: R20.1@25,27.4 25.681,27.4 26.42,28.139 26.42,29.422 26.7,29.702 Q9.3
NetQ10_3: Q10.3 R21.1 | length 3.5
  Bottom Layer w0.254: R21.1@23.5,27.5 Q10.3
USIM_CLK: C11.2 IC1.46 R16.2 | length 10.7
  Top Layer w0.254: IC1.46 v1(7.6,12.8)
  Bottom Layer w0.254: v1(7.6,12.8) 8.64,12.8 8.833,12.607 8.833,12.345 9.025,12.153 9.975,12.153 10.3,12.478 10.3,17.2 R16.2
USIM_DATA: C10.2 IC1.45 R15.2 | length 7.4
  Top Layer w0.254: R15.2 2.3,14.306 2.552,14.558 4.143,14.558 4.801,13.9 v1(7.6,13.9)
  Bottom Layer w0.254: v1(7.6,13.9) C10.2@8.64,13.9
USIM_RST: C12.2 IC1.44 R17.2 | length 2.7
  Top Layer w0.254: IC1.44 v1(7.6,15)
  Bottom Layer w0.254: R17.2 7.334,15.2 v1@7.534,15 ; v1(7.6,15) C12.2@8.62,15
USIM_VDD: C9.2 D9.1 IC1.43 R14.2 U1.8 | length 11.5
  Top Layer w0.254: R14.2 1.3,14.2 2.072,14.972 4.482,14.972 5.635,16.125 ; v2(5.5,17.7) 5.5,16.26 5.635,16.125 ; IC1.43@6.77,16.125 5.635,16.125 ; IC1.43 v1(7.6,16.1)
  Bottom Layer w0.254: v2(5.5,17.7) 5.5,17.605 U1.8 ; D9.1 7.849,17.1 7.847,17.098 7.847,16.684 7.644,16.481 7.644,16.144 v1(7.6,16.1) C9.2@8.6,16.1
VDD_EXT: IC1.29 J2.5 Q1.1 Q2.1 Q3.1 Q4.1 Q5.1 Q6.1 R1.2 R3.2 R5.2 R7.2 R9.2 R11.2 | length 61.1
  Top Layer w0.254: IC1.29 11.07,30 11.493,29.577 11.493,29.515 12.65,28.358 18.524,28.358 19.445,27.438 v2(21.438,27.438) ; v2(27.5,21.4) 27.5,22.377 29.264,24.14 32.006,24.14 32.51,23.636 32.51,22.924 32.006,22.42 31.845,22.42 31.435,22.01 J2.5
  Bottom Layer w0.254: Q2.1 4.775,23.2 R3.2 5.884,23.459 5.884,25.616 ; Q1.1 3.872,26.488 4.837,26.488 R1.2@5,26.325 ; R1.2 5.523,25.802 5.698,25.802 5.884,25.616 ; Q6.1 Q6.1@11.15,28.667 ; v2(13.488,28.358) 13.582,28.358 13.738,28.515 Q5.1@14.288,28.515 ; Q5.1@14.45,28.677 Q5.1 ; Q4.1 17.75,28.667 17.325,28.242 R7.2 17.152,27.327 17.152,27.315 16.71,26.873 15.84,26.873 15.226,27.487 15.226,27.891 14.45,28.667 14.025,28.242 R9.2 13.852,27.327 13.852,27.315 13.41,26.873 12.54,26.873 11.926,27.487 11.926,27.891 Q6.1@11.15,28.667 ; Q3.1 21.15,27.925 ; v2(21.438,27.438) 21.372,27.504 21.372,27.703 21.15,27.925 ; v2(27.5,21.4) 26.251,21.4 22.805,24.846 22.805,25.144 21.454,26.495 21.024,26.495 20.7,26.819 20.7,27.475 21.15,27.925 ; 5.884,25.616 9.522,25.616 10.725,26.819 10.725,28.242 Q6.1@11.15,28.667
pads on no net: IC1.1 IC1.2 IC1.4 IC1.5 IC1.6 IC1.7 IC1.11 IC1.12 IC1.13 IC1.14 IC1.16 IC1.18 IC1.19 IC1.24 IC1.25 IC1.26 IC1.30 IC1.36 IC1.37 IC1.38 IC1.39 IC1.40 IC1.41 IC1.42 IC1.51 IC1.56 IC1.57 IC1.63 IC1.64 IC1.65 IC1.66 IC1.76 IC1.77 IC1.78 IC1.83 IC1.84 IC1.85 IC1.86 IC1.87 IC1.88 IC1.92 IC1.93 IC1.94 IC1.95 IC1.96 IC1.97 IC1.98 IC1.99 J2.6 J2.11 J2.12 J2.13 LED1.1 LED1.3 LED2.1 LED2.2 U1.2 U1.4 U1.5

## Polygon pours and split planes (outlines as drawn)
+3V8_BB on Bottom Layer "+3V8_BB_L04_P011" (solid, pour order 11): 3.3,35.8 3.9,36.4 7.5,36.4 8.1,35.8 8.1,33.9 7.3,33.1 7.3,28.1 6.48,27.28 5.655,27.28 5.203,27.732 4.68,27.732 4.68,28.62 4.64,28.58 3.97,28.58 3.62,28.58 3.3,28.9
+3V8_RF on Bottom Layer "+3V8_RF_L04_P004" (solid, pour order 4): 10.649,6.96 10.801,6.808 10.901,6.708 12.601,6.708 12.601,10.908 10.501,10.908 10.001,10.408 10.001,9.464 10.649,8.816
+3V8_BB on Bottom Layer "+3V8_BB_L04_P001" (solid, pour order 1): 3.42,36.2 5.3,31.2 6.22,30.28 6.72,30.28 7.42,29.58 8.42,29.58 8.72,29.28 8.72,27.38 8.62,27.28 4.82,27.28 4.52,27.58 4.52,28.38 4.32,28.58 3.62,28.58 3.42,28.78 3.42,31.58
+3V8_RF on Int2 (PWR) "+3V8_RF_L03_P003" (solid, pour order 3): 12.7,6.9 12.3,6.5 9.9,6.5 9.5,6.9 9.5,31 8.5,32 8.5,36 8.8,36.3 12.4,36.3 12.7,36
+3V8_BB on Int2 (PWR) "+3V8_BB_L03_P000" (solid, pour order 0): 3.7,36.3 3.9,36.3 7.9,36.3 8.2,35.9 8.2,28.3 7.5,27.4 4.7,27.4 4.4,27.7 4.4,27.8 3.3,28.9 3.3,35.7 3.9,36.3
GND on Top Layer "NONET_L04_P-001" (solid, pour order 18): 22.3,4.1 24.4,4.1 24.4,1.2 22.3,1.2
GND on Top Layer "NONET_L04_P-001" (solid, pour order 17): 18.2,4.1 20.3,4.1 20.3,1.2 18.2,1.2
GND on Top Layer "NONET_L04_P-001" (solid, pour order 16): 7.825,4.1 9.925,4.1 9.925,1.2 7.825,1.2
GND on Top Layer "NONET_L04_P-001" (solid, pour order 15): 3.725,4.1 5.825,4.1 5.825,1.2 3.725,1.2
+3V8_RF on Top Layer "+3V8_RF_L01_P012" (solid, pour order 12): 12.4,11.3 12.7,11 12.7,10.6 12.6,10.5 12.6,8.7 12.5,8.6 12.5,7.1 12.3,6.9 11,6.9 10.6,7.3 10.6,9.1 10.5,9.2 9.9,9.2 9.7,9.4 9.7,11 10,11.3
+3V8_BB on Top Layer "+3V8_BB_L01_P008" (solid, pour order 8): 5.5,30.5 5.8,30.8 7.3,30.8 7.6,30.5 7.6,27.5 7.5,27.4 5.6,27.4 5.5,27.5
GND on Top Layer "GND_L01_P006" (solid, pour order 6): 15.643,10.236 15.843,10.036 15.843,8.936 15.643,8.736 15.043,8.736 14.943,8.636 14.943,6.936 14.743,6.736 13.043,6.736 12.843,6.936 12.843,9.936 13.143,10.236
GND on Int1 (GND) "GND_L02_P010" (solid, pour order 10): -1.2,41.2 -1.1,41.3 34.7,41.3 34.8,41.2 34.8,-1 -1,-1

## Silkscreen, mask and mechanical layers (free items; w line width, h text height)
Top Overlay:
  text "NET" at 1.5,30.5 h1 r90
  text "STA" at 1.5,26.7 h1 r90
  text "DEBUG" at 28.9,26.4 h1 r90
  text "MAIN" at 25.3,1.5 h1 r90
  text "GNSS" at 10.9,1.4 h1 r90
  text "FIoT_BG96 V1.0 / © 2023 Lumen Electronics" at 30.7,0.725 h1 r90
Bottom Overlay:
Board:
  the board outline again, w0.2

## Text inside footprints (layer, text, board x,y; h text height)
D2: Mechanical 13 "*" at 1.065,35.335 h1.27 r270
D5: Mechanical 13 "*" at 28.135,16.545 h1.27 r90
D13: Mechanical 13 "*" at 2.335,35.335 h1.27 r90
J1: Bottom Overlay "22" at 2.6,38.7 h0.6; Bottom Overlay "21" at 2.9,33.2 h0.6; Bottom Overlay "2" at 32.23,37.3 h0.6; Bottom Overlay "1" at 31.93,34.6 h0.6